# Altium PCB voice.PcbDoc
Units mm, origin at the board's own origin, x right, y up, seen from the top; angles counter-clockwise.
Board outline 15.12 x 32.08 mm, 2 copper layers (Top Layer, Bottom Layer); 18 components, 12 nets, 56 pads, 46 vias.
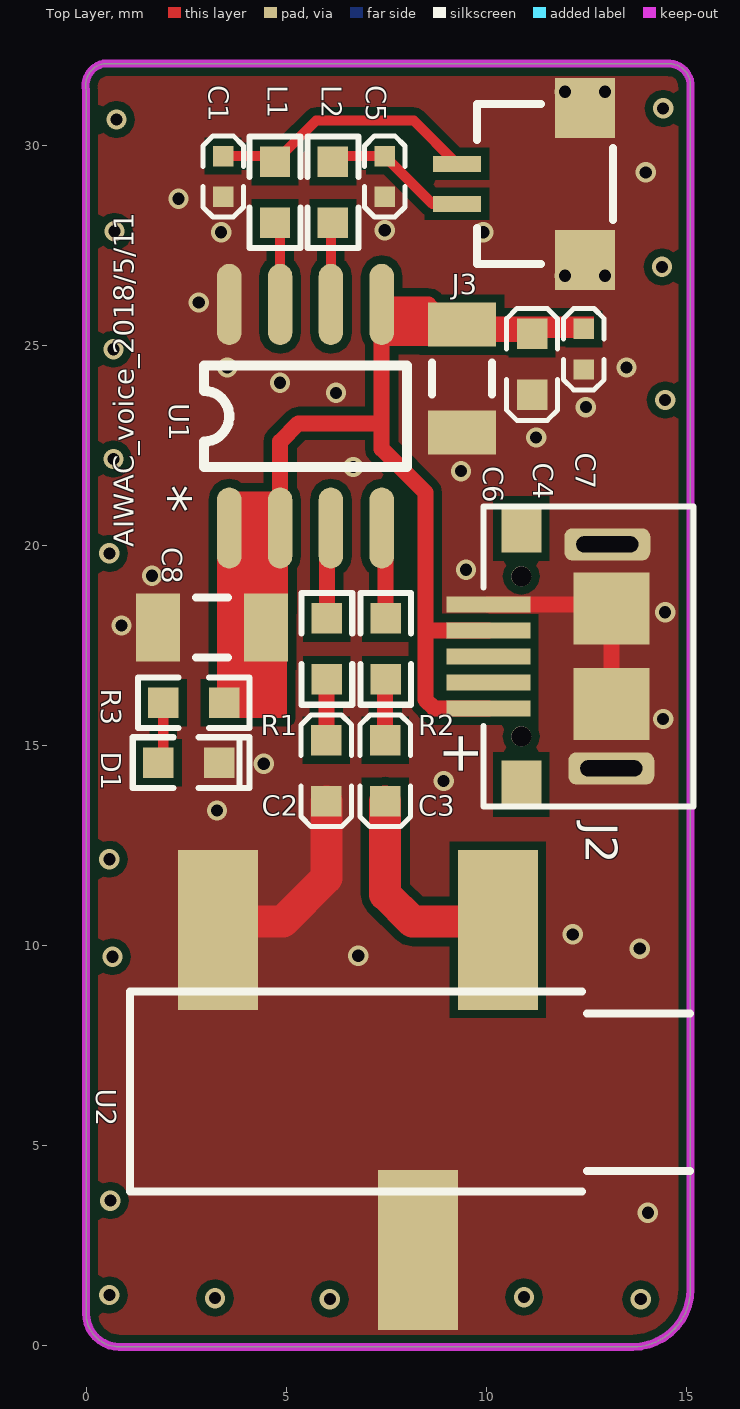
[diagram p0: Top Layer view]
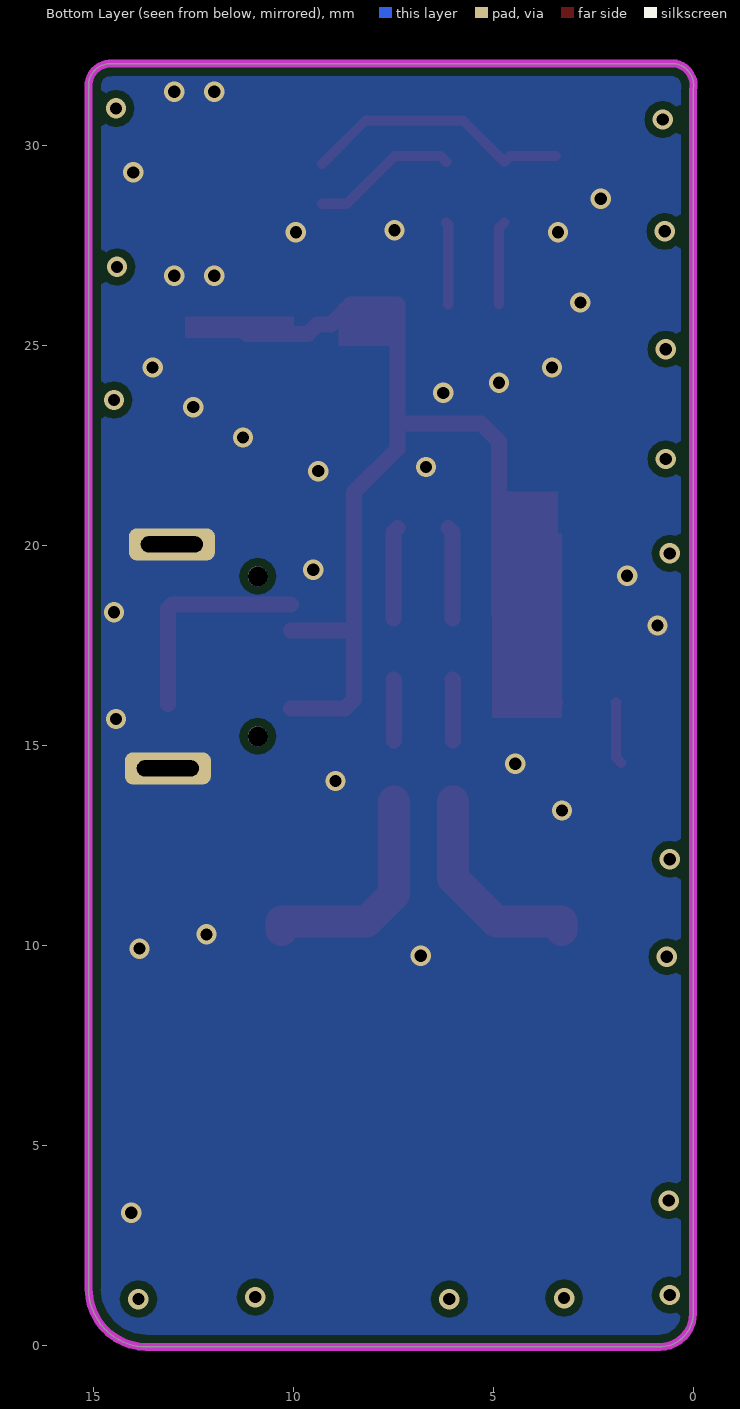
[diagram p1: Bottom Layer view, seen from below]
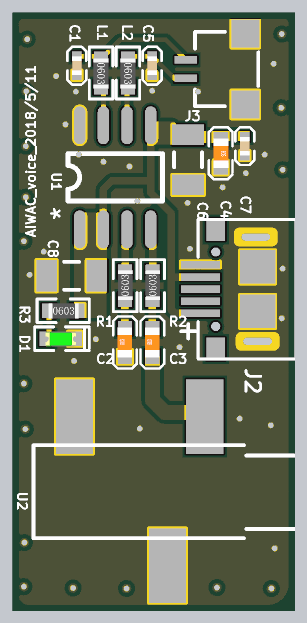
[diagram p2: 3D render of the assembled board from above, using the file's embedded part models]

## Layer stack, top to bottom
Top Solder: solder mask 0.0102, Solder Resist, Dk 3.5
Top Layer: signal copper 0.0356
Dielectric 1: dielectric 0.32, FR-4, Dk 4.8
Bottom Layer: signal copper 0.0356
Bottom Solder: solder mask 0.0102, Solder Resist, Dk 3.5

## Board outline
0,0.813 0,31.394 cw(c0.546,31.509) 0.432,32.055 14.503,32.055 cw(c14.565,31.509) 15.111,31.571 15.111,1.42 cw(c13.665,1.42) 13.665,-0.025 0.838,-0.025 cw(c0.838,0.813)

## Design rules (kind name [scope] priority, off if disabled: settings)
Clearance [All] p1: gap=0.203
HoleToHoleClearance [All] p1: gap=0.076 allowstackedmicrovias=TRUE
MinimumSolderMaskSliver [All] p1: minsoldermaskwidth=0.025
PlaneClearance [All] p1: clearance=0.203
PlaneConnect [All] p1: planeconnectstyle=Direct reliefexpansion=0.508 reliefentries=4 reliefconductorwidth=0.254 reliefairgap=0.254
PolygonConnect [All] p1: connectstyle=Direct reliefconductorwidth=0.254 reliefentries=4 polygonreliefangle="90 Angle" airgapwidth=0.254
RoutingVias [All] p1: holewidth=0.254 width=0.508 viastyle="Through Hole" minholewidth=0.254 minwidth=0.508 maxholewidth=0.254 maxwidth=0.508
SilkToSilkClearance [All] p1: silktosilkclearance=0
SilkToSolderMaskClearance [IsPad] p1: minsilkscreentomaskgap=0.025 clearancetoexposedcopper=TRUE
SolderMaskExpansion [All] p1: expansion=0.102
Width [All] p1: maxlimit=0.8 minlimit=0.254 preferedwidth=0.4
24 further rules are at their usual default settings.

## Components (designator, comment, footprint, x,y, rotation, side; value= is the part's Value field where it differs from the comment)
C1 "1NF" C0402 3.429,29.743 r270 top
C2 "4.7NF" C0603 6.007,13.614 r90 top
C3 "4.7NF" C0603 7.48,13.614 r90 top
C4 "10UF" C0603 11.151,25.298 r270 top
C5 "1NF" C0402 7.468,29.743 r270 top
C6 "220UF 20%" C1206 9.398,24.181 r90 top
C7 "1UF" C0402 12.446,24.409 r90 top
C8 "220UF 20%" C1206 3.15,17.958 r0 top
D1 "LED0603G" D-LED0603G 1.803,14.58 r0 top
J2 "USB-MINI-SOCKET" "MICRO-USB - 5.9" 15.189,13.487 r90 top locked
J3 "SH1.0-T-1-LT-2A" J-SH1.0-T-1-LT-2A 9.271,29.553 r270 top
L1 "120R" R0603 4.724,29.604 r270 top
L2 "120R" R0603 6.172,29.604 r270 top
R1 "150K" R0603 6.02,16.662 r90 top
R2 "150K" R0603 7.493,16.662 r90 top
R3 "10KF" R0603 1.93,16.078 r0 top
U1 "SOP-8" SOP-8 3.581,20.447 r90 top locked
U2 "耳机-3P" 耳机 12.395,6.401 r90 top locked

## Footprints (in the part's own frame and the unit in brackets; to place one, negate y for a bottom-side part, rotate by r counter-clockwise, add the part's x,y. Pads: shape width x height; smd on the part's side, far side on the other; paste and mask are expansions set on the pad)
C0402 [mil]
  rect 20x20 smd: 1(0,0) 2(40,0)
  silkscreen extent -20,-20 60,20, body extent 0,-10 40,10, height 20
C0603 [mil]
  rect 30x30 smd: 1(0,0) 2(60,0)
  silkscreen extent -25,-25 85,25, body extent -1,-15 61,16, height 12
C1206 [mm] "Chip Capacitor, Body 3.2x1.6mm, IPC High Density"
  rect 1.1x1.7 smd: 1(-1.35,0) 2(1.35,0)
  silkscreen extent -0.4,-0.75 0.4,0.75, body extent -1.7,-0.9 1.7,0.9, height 1.3
D-LED0603G [mil]
  rect 30x30 smd: 1(0,0) 2(60,0)
  silkscreen extent -25,-25 90,25, body extent -2,-16 62,15, height 24
J-SH1.0-T-1-LT-2A [mm]
  rect 0.4x1.2 smd: 1(0,0) 2(1,0)
  rect 1.5x1.5 smd: 3(-1.4,3.2) 4(2.4,3.2)
  silkscreen extent -1.5,0.5 2.5,3.9
"MICRO-USB - 5.9" [mm]
  rect 1.2x1 smd: 0(0.55,4.307) 0(6.95,4.307)
  rect 0.4x2.1 smd: 1(2.45,5.132) 2(3.1,5.132) 3(3.75,5.132) 4(4.4,5.132) 5(5.05,5.132)
  rrect50% 0.8x2.15 hole 0.4 slot 1.55 at 90 deg: 6(0.95,2.057) 6(6.55,2.157)
  rect 1.8x1.9 smd: 6(2.556,2.057) 6(4.943,2.057)
  round 0.5 hole 0.5 unplated: ""(1.75,4.307) ""(5.75,4.307)
  silkscreen extent 0,0 7.5,5.25
R0603 [mil]
  rect 30x30 smd: 1(0,0) 2(60,0)
  silkscreen extent -25,-25 85,25, body extent 0,-16 62,15, height 18
SOP-8 [mil] "VOICE"
  oval 80x24 smd: 1(0,0) 2(0,-50) 3(0,-100) 4(0,-150) 5(220,-150) 6(220,-100) 7(220,-50) 8(220,0)
  silkscreen extent 60,-175 160,25
耳机 [mm] "voice-3P"
  rect 4x2 smd: 1(-4,4.1) 2(4,2.1) 3(4,9.1)
  silkscreen extent -2.54,-2.7 2.46,11.3, body extent -2.54,-2.67 2.54,11.3, height 3.05

## Part data
C1 C5: library part C0402X7R-220J10V, "贴片电容-陶瓷"
C2 C3 C4: library part C0603X7R-330J25V, "贴片电容-陶瓷"
C6 C8: library part "C1206-A型 极性电容", "C 1206钽电容 --220UF 10V 3216 A型 有极性电容 3.2mm X 1.6mm"
C7: library part C0402X7R-105J10V, "贴片电容-陶瓷"
D1: library part DLED-0603-G, "贴片二极管-LED"
J2: library part J-USB-MINI-SOCKET, "USB-A卧式插座"
J3: "接插件-SH1.0-T-1-LT-2A"
L1 L2: library part R0603-47KF, "贴片电阻-通用"
R1 R2 R3: library part R0603-10KF, "贴片电阻-通用"
U1: library part CS8508E

## Via types
v1: diameter 0.508, hole 0.305, Top Layer to Bottom Layer, tented both sides, 46 vias

## Nets (pads, with @x,y where several pads share a name; then routed paths per layer and width w, separated by ;. In a path a pad name is that pad's centre, name@x,y a point inside that pad or via, vN(x,y) a via of type N, cw(c..) or ccw(c..) an arc to the next point about the centre after c; other vN are vias at no path point)
GND: C1.2 C2.1 C4.2 C5.2 C6.1 C7.1 C8.1 D1.2 J2.5 J2.6 J3.3 J3.4 U1.8 U2.1 U2.3 | length 10.8
  Top Layer w0.4: J2.5 13.025,18.537 13.132,18.431 J2.6@13.132,16.043
  Top Layer w0.8: U2.3 3.295,10.611 4.921,10.611 6.007,11.697 C2.1
  other v1: 14.046,3.327 6.807,9.754 13.843,9.931 12.167,10.287 3.277,13.386 8.941,14.122 4.445,14.554 14.427,15.672 0.889,18.009 14.478,18.339 1.651,19.253 9.5,19.406 9.373,21.869 6.68,21.971 11.252,22.708 12.497,23.47 6.248,23.825 4.851,24.079 3.531,24.46 13.513,24.46 2.819,26.086 11.971,26.753 12.971,26.753 3.378,27.838 9.931,27.838 7.468,27.889 2.311,28.677 13.995,29.337 11.971,31.353 12.971,31.353
NetC1_1: C1.1 J3.1 L1.1 | length 6.8
  Top Layer w0.254: C1.1 4.585,29.743 L1.1 5.753,30.632 8.192,30.632 J3.1
NetC2_2: C2.2 R1.1 | length 1.5
  Top Layer w0.4: C2.2 6.007,16.65 R1.1
NetC3_1: C3.1 U2.2 | length 5.6
  Top Layer w0.8: C3.1 7.48,11.29 8.16,10.611 10.295,10.611 U2.2
NetC3_2: C3.2 R2.1 | length 1.5
  Top Layer w0.4: C3.2 7.48,16.65 R2.1
NetC5_1: C5.1 J3.2 L2.1 | length 3.7
  Top Layer w0.254: L2.1 6.312,29.743 C5.1 8.658,28.553 J3.2
NetD1_1: D1.1 R3.1 | length 1.6
  Top Layer w0.254: D1.1 1.93,14.707 R3.1
NetL1_2: L1.2 U1.7 | length 2.1
  Top Layer w0.254: L1.2 4.851,27.953 U1.7
NetL2_2: L2.2 U1.6 | length 2.1
  Top Layer w0.254: U1.6 6.121,28.029 L2.2
NetR1_2: R1.2 U1.3 | length 2.3
  Top Layer w0.4: R1.2 6.02,20.345 U1.3
NetR2_2: R2.2 U1.4 | length 2.3
  Top Layer w0.4: U1.4 7.493,20.345 R2.2
VCC-5V0: C4.1 C6.2 C7.2 C8.2 J2.1 J2.4 R3.2 U1.1 U1.2 U1.5 | length 30.4
  Top Layer w0.4: R3.2 4.039,16.078 4.5,16.539 C8.2 4.851,18.31 U1.2 ; U1.1 U1.2 ; J2.1 8.701,15.937 8.484,16.154 8.484,17.932 ; J2.4 8.529,17.887 8.484,17.932 ; C7.2 11.278,25.425 C4.1 9.63,25.298 C6.2 9.064,25.531 8.56,26.035 U1.5 7.391,23.063 ; U1.2 4.851,22.606 5.309,23.063 7.391,23.063 ; 7.391,23.063 7.391,22.428 8.484,21.336 8.484,17.932
pads on no net: J2. J2.0 J2.2 J2.3
copper on no net:
  other v1: 6.096,1.168 13.868,1.168 3.226,1.194 10.947,1.219 0.584,1.27 0.61,3.632 0.66,9.728 0.584,12.167 0.584,19.812 0.686,22.174 14.478,23.647 0.686,24.917 14.402,26.975 0.711,27.864 0.762,30.658 14.427,30.937

## Polygon pours and split planes (outlines as drawn)
GND on Top Layer "bottom" (solid, remove dead copper, pour order 12): -0.305,32.156 -0.203,32.258 15.469,32.258 15.469,0.051 15.113,-0.305 15.011,-0.203 -0.127,-0.203 -0.127,32.08 -0.305,32.258
GND on Bottom Layer "bottom" (solid, remove dead copper, pour order 14): -0.178,32.258 -0.076,32.156 15.164,32.156 15.164,-0.254 15.215,-0.305 15.164,-0.254 -0.254,-0.254 -0.254,32.004 -0.152,32.106

## Keep-outs
Keep-Out Layer:
  lines w0.2: 0.94,74.167 cw(c1.44,74.167) 1.44,74.667 ; 0,0.813 ccw(c0.838,0.813) 0.838,-0.025 13.665,-0.025 ccw(c13.665,1.42) 15.111,1.42 15.111,31.571 ccw(c14.565,31.509) 14.503,32.055 0.432,32.055 ccw(c0.546,31.509) 0,31.394 0,0.813

## Other copper
Top Layer:
  rectangle net VCC-5V0: 7.391,24.994 8.865,26.06
  rectangle net VCC-5V0: 9.982,25.197 12.7,25.73
  rectangle net VCC-5V0: 3.378,19.507 4.826,21.361
  rectangle net VCC-5V0: 3.277,15.697 5.029,20.32

## Silkscreen, mask and mechanical layers (free items; w line width, h text height)
Top Overlay:
  text "AIWAC_voice_2018/5/11" at 1.194,19.964 h0.5 r90

## Text inside footprints (layer, text, board x,y; h text height)
J2: Top Overlay "+" at 9.804,14.224 h1 r90
U1: Top Overlay "*" at 3.073,20.828 h1.02 r90